# Altium PCB WX0.011.322PCB-4.2.PcbDoc (part 1 of 2)
Units mm, origin at the board's own origin, x right, y up, seen from the top; angles counter-clockwise.
Board outline 260.36 x 86.43 mm, 2 copper layers (Top Layer, Bottom Layer); 138 components, 92 nets, 432 pads, 350 vias.
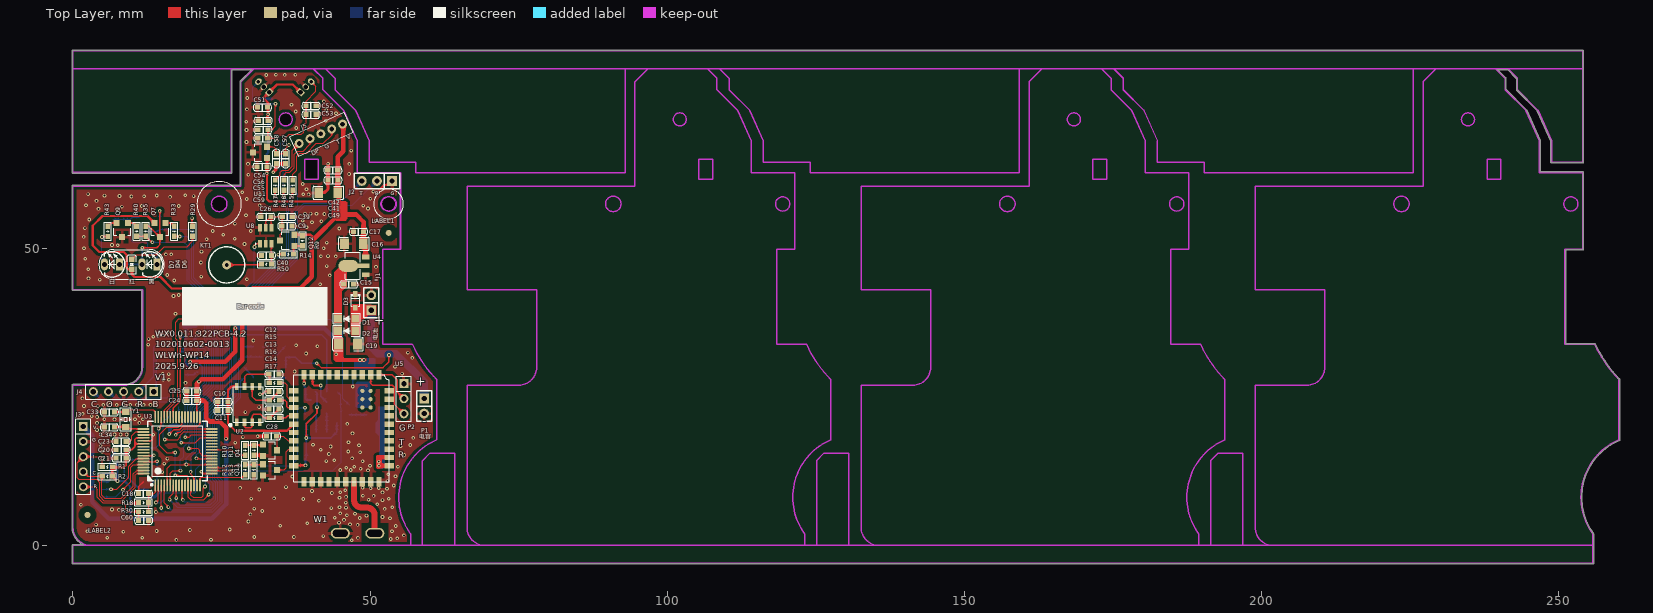
[diagram p0: Top Layer view]
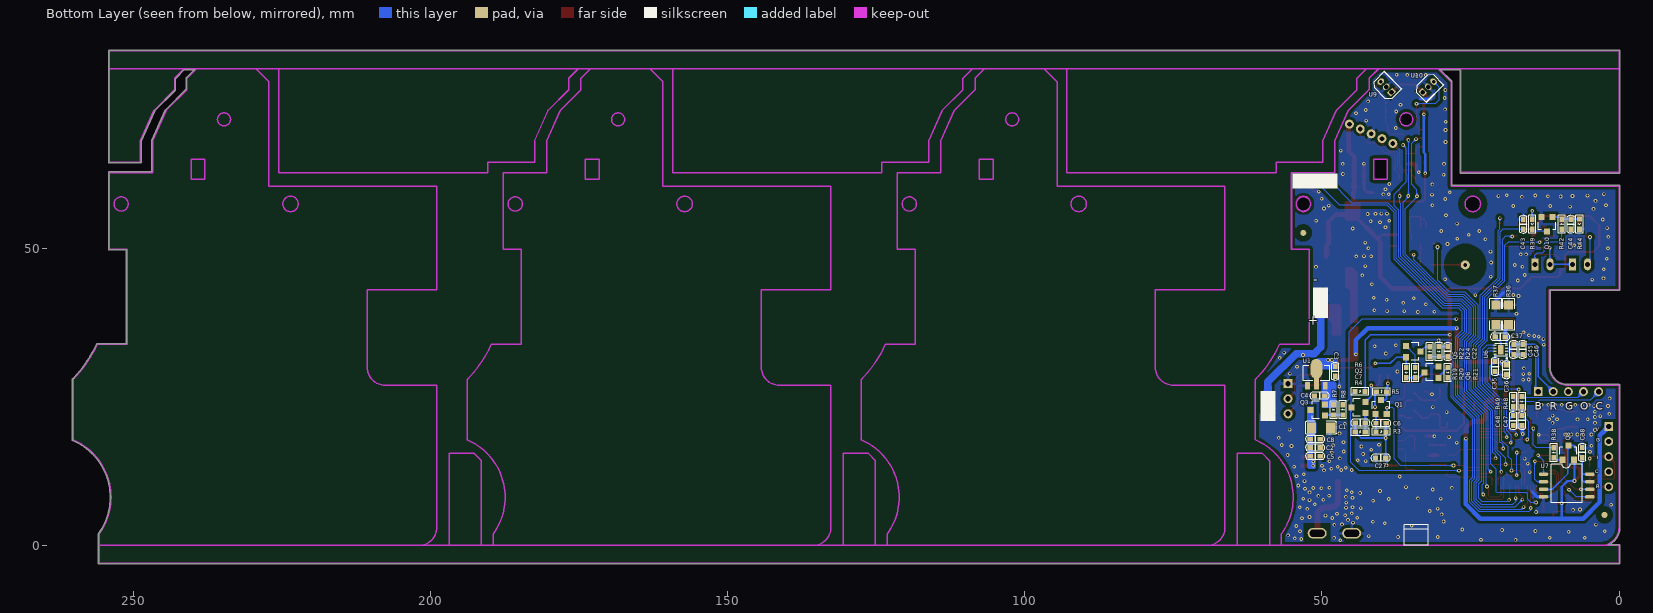
[diagram p1: Bottom Layer view, seen from below]

## Layer stack, top to bottom
Top Solder: solder mask 0.0102, Solder Resist, Dk 3.5
Top Layer: signal copper 0.0356
Dielectric 1: dielectric 0.32, FR-4, Dk 4.8
Bottom Layer: signal copper 0.0356
Bottom Solder: solder mask 0.0102, Solder Resist, Dk 3.5

## Board outline
-0.127,0 cw(c0,0) 0,0.127 1.757,0.127 cw(c3,2.997) -0.127,2.997 -0.127,26.957 cw(c0,26.957) 0,27.084 8.7,27.084 cw(c8.7,26.957) 8.7,27.084 cw(c8.7,26.957) 8.7,27.084 ccw(c8.7,29.957) 11.573,29.956 ccw(c8.7,29.957) 11.573,29.957 cw(c11.7,29.957) 11.573,29.958 11.573,42.915 0,42.915 cw(c0,43.043) -0.127,43.043 -0.127,60.443 cw(c0,60.443) 0,60.57 28.114,60.57 28.114,77.987 cw(c28.241,77.987) 28.152,78.077 28.151,78.077 30.123,80.049 26.748,80.049 26.748,62.738 cw(c26.621,62.738) 26.621,62.611 0,62.611 cw(c0,62.738) -0.127,62.738 -0.127,80.167 cw(c0,80.167) -0.127,80.171 cw(c0,80.176) -0.127,80.176 -0.127,83.176 cw(c0,83.176) 0,83.303 254,83.303 cw(c254,83.176) 254.127,83.176 254.127,64.491 cw(c254,64.491) 254,64.363 248.755,64.363 cw(c248.755,64.491) 248.627,64.491 248.627,68.05 246.379,73.101 242.899,76.581 242.899,76.58 cw(c242.989,76.671) 242.862,76.671 242.862,78.523 241.336,80.049 239.646,80.049 241.029,78.666 241.028,78.666 cw(c240.939,78.576) 241.066,78.576 241.066,76.724 244.525,73.264 cw(c244.435,73.174) 244.552,73.226 246.821,68.13 246.821,68.129 246.821,68.13 cw(c246.704,68.078) 246.832,68.078 246.832,62.843 254,62.843 cw(c254,62.716) 254.127,62.716 254.127,49.835 cw(c254,49.835) 254,49.707 251.127,49.707 251.127,33.924 256.014,33.924 cw(c256.014,33.797) 256.13,33.851 ccw(c275.5,42.883) 260.158,28.004 cw(c260.1,27.89) 260.227,27.89 260.227,17.78 cw(c260.102,17.759) 260.229,17.759 cw(c260.102,17.759) 260.151,17.642 ccw(c264.2,8.092) 253.827,8.092 cw(c253.7,8.092) 253.827,8.081 ccw(c264.199,8.092) 255.795,2.013 cw(c255.692,1.938) 255.819,1.938 255.819,0 cw(c255.692,0) 255.819,-0.005 255.819,-3 cw(c255.691,-3) 255.691,-3.127 0,-3.127 cw(c0,-3) -0.127,-3
cut-out: 39.003,64.973 39.003,61.573 41.303,61.573 41.303,64.973
cut-out: 35.79,70.567 cw(c35.79,71.667) 34.69,71.667 cw(c35.79,71.667) 35.79,72.767 cw(c35.79,71.667) 36.89,71.667 cw(c35.79,71.667)
cut-out: 24.6,56.142 cw(c24.6,57.442) 23.3,57.442 cw(c24.6,57.442) 24.6,58.742 cw(c24.6,57.442) 25.9,57.442 cw(c24.6,57.442)
cut-out: 53.1,56.142 cw(c53.1,57.442) 51.8,57.442 cw(c53.1,57.442) 53.1,58.742 cw(c53.1,57.442) 54.4,57.442 cw(c53.1,57.442)

## Design rules (kind name [scope] priority, off if disabled: settings)
Clearance VIA-VIA [ISVIA vs ISVIA] p1: gap=0.508 ignorepadtopadclearanceinfootprint=FALSE except(0: Arc-Hole Track-Hole SMDPad-Hole THPad-Hole Via-Hole Fill-Hole Poly-Hole Region-Hole Text-Hole)
Clearance VIA-PAD [ISVIA vs ISPAD] p2: gap=0.381 ignorepadtopadclearanceinfootprint=FALSE except(0: Arc-Hole Track-Hole SMDPad-Hole THPad-Hole Via-Hole Fill-Hole Poly-Hole Region-Hole Text-Hole)
Clearance VIA-TRACK [ISVIA vs ISTRACK] p3: gap=0.381 ignorepadtopadclearanceinfootprint=FALSE except(0: Arc-Hole Track-Hole SMDPad-Hole THPad-Hole Via-Hole Fill-Hole Poly-Hole Region-Hole Text-Hole)
Clearance Polygon [InPolygon] p4: gap=0.508 ignorepadtopadclearanceinfootprint=FALSE except(0: Arc-Hole Track-Hole SMDPad-Hole THPad-Hole Via-Hole Fill-Hole Poly-Hole Region-Hole Text-Hole)
Clearance [All] p5: gap=0.178 ignorepadtopadclearanceinfootprint=FALSE except(0: Arc-Hole Track-Hole SMDPad-Hole THPad-Hole Via-Hole Fill-Hole Poly-Hole Region-Hole Text-Hole)
ComponentClearance [All] p1 off: gap=0.254 collisioncheckmode=3 verticalgap=0.254 showdistances=FALSE
FabricationTestPointUsage TestPointUsage [All] p1: valid=0 allowmultiple=FALSE
FabricationTestpoint Testpoint [(IsPad And (OnTopLayer Or OnBottomLayer))] p1: side=3 testpointundercomponent=TRUE minsize=1.016 maxsize=2.54 preferedsize=1.524 minholesize=0 maxholesize=1.016 preferedholesize=0.813 testpointgrid=0.025 allowsidetop=TRUE allowsidebottom=TRUE usegrid=TRUE gridtolerance=0
HoleSize [All] p1 off: absolutevalues=TRUE maxlimit=7.62 minlimit=0 maxpercent=80.000 minpercent=20.000
HoleToHoleClearance [All] p1 off: gap=0.254 allowstackedmicrovias=TRUE
LayerPairs [All] p1 off: enforce=TRUE
MinimumSolderMaskSliver [All] p1 off: minsoldermaskwidth=0.254
NetAntennae [All] p1 off: netantennaetolerance=0
PlaneConnect [All] p1: planeconnectstyle=Relief reliefexpansion=0.508 reliefentries=4 reliefconductorwidth=0.508 reliefairgap=0.254
PolygonConnect [isvia] p1: connectstyle=Direct reliefconductorwidth=0.381 reliefentries=4 polygonreliefangle="90 Angle" airgapwidth=0.254
PolygonConnect PolygonConnect_1 [All] p2: connectstyle=Relief reliefconductorwidth=0.508 reliefentries=4 polygonreliefangle="90 Angle" airgapwidth=0.508
RoutingVias [All] p1: holewidth=0.254 width=0.508 viastyle="Through Hole" minholewidth=0.127 minwidth=0.127 maxholewidth=1.27 maxwidth=2.54
SilkToBoardRegionClearance [All] p1 off:
SilkToSilkClearance [All] p1 off: silktosilkclearance=0.254
SilkToSolderMaskClearance [IsPad] p1 off: minsilkscreentomaskgap=0.254 clearancetoexposedcopper=TRUE
SolderMaskExpansion [All] p1: expansion=0.102
Width [All] p1: maxlimit=7.62 minlimit=0.203 preferedwidth=0.203
18 further rules are at their usual default settings.

## Classes and differential pairs
component class WX0.011.324DL: C6 C7 C10 C11 C12 C13 C14 C27 C28 E1 P2 Q1 Q2 Q4 Q11 R3 R4 R5 R6 R10 R11 R12 R13 R15 R16 R17 U2 U5 W1
component class WX0.011.323DL: "Bar code" C1 C2 C3 C4 C5 C8 C9 C15 C16 C17 C18 C19 C20 C21 C22 C23 C24 C25 C26 C33 C34 C35 C36 C37 C38 C39 C40 C41 C42 C43 C44 C45 C46 C47 C48 C49 C51 C52 C53 C54 C55 C56 C57 C58 C59 C60 D1 D2 D3 D4 D6 D7 J1 J2 J3 J4 J5 KT1 LABEL1 LABEL2 P1 Q3 Q5 Q6 Q7 Q8 Q9 Q10 Q12 R1 R2 R7 R8 R9 R14 R18 R19 R20 R21 R22 R24 R29 R30 R33 R35 R36 R37 R38 R39 R40 R42 R43 R44 R45 R46 R47 R48 R49 R50 U1 U3 U4 U6 U7 U8 U9 U10 U11 Y1

## Components (designator, comment, footprint, x,y, rotation, side; value= is the part's Value field where it differs from the comment)
"Bar code" "Bar code" "Bar Code1" 83.745,62.535 r270 top
C1 "100uF/6.3V" GRM1206 50.149,19.787 r270 bottom
C2 "33pF/50V" CAP0603 51.945,16.459 r180 bottom
C3 "100nF/50V" CAP0603 47.728,30.124 r270 bottom
C4 "100nF/50V" CAP0603 49.532,25.171 r0 bottom
C5 "10pF/50V" CAP0603 51.945,15.011 r180 bottom
C6 "1nF" CAP0603 40.859,20.549 r180 bottom
C7 "1nF" CAP0603 44.359,20.619 r180 bottom
C8 "100nF/50V" CAP0603 51.945,17.882 r180 bottom
C9 "100pF/50V" CAP0603 36.832,53.721 r180 top
C10 "1μF/16V" CAP0603 24.386,24.155 r0 top
C11 "33pF" CAP0603 24.386,22.682 r0 top
C12 "33pF" CAP0603 34.647,28.804 r180 top
C13 "33pF" CAP0603 32.983,25.883 r0 top
C14 "33pF" CAP0603 32.983,22.936 r0 top
C15 "10uF/16V" CAP0603 45.569,43.917 r0 top
C16 "100uF" GRM1206 47.253,50.737 r270 top
C17 "100nF" CAP0603 47.195,52.769 r0 top
C18 "100nF" CAP0603 11.043,8.718 r0 top
C19 "100uF" GRM1206 46.28,33.846 r90 top
C20 "100nF" CAP0603 7.266,16.079 r0 top
C21 "10μF/10V" CAP0603 7.266,14.669 r0 top
C22 "10pF" CAP0603 28.805,33.434 r270 bottom
C23 "100nF" CAP0603 7.266,17.489 r0 top
C24 "100nF" CAP0603 19.152,24.359 r0 top
C25 "100nF" CAP0603 19.152,25.908 r0 top
C26 "1uF/16V" CAP0603 33.289,55.27 r180 top
C27 "1uF/16V" CAP0603 39.27,14.707 r0 bottom
C28 "33pF/50V" CAP0603 32.551,18.364 r0 top
C33 "22pF" CAP0603 5.281,22.442 r0 top
C34 "22pF" CAP0603 5.281,19.902 r0 top
C35 "100nF" CAP0603 20.855,29.249 r90 bottom
C36 "100nF" CAP0603 18.925,30.378 r270 bottom
C37 "10nF" CAP0603 20.83,35.066 r180 bottom
C38 "100nF" CAP0603 6.174,16.441 r270 bottom
C39 "100nF" CAP0603 35.206,55.296 r0 top
C40 "5pF" CAP0603 31.713,48.782 r0 top
C41 "100nF" CAP0603 42.902,61.443 r0 top
C42 "10μF/10V" CAP0603 42.877,63.094 r0 top
C43 "100pF/50V" CAP0603 16.131,53.194 r90 bottom
C44 "10pF/50V" CAP0603 8.104,54.865 r270 bottom
C45 "33pF" CAP0603 17.731,33.821 r270 bottom
C46 "100nF" CAP0603 16.207,33.821 r270 bottom
C47 "10nF" CAP0603 16.308,21.832 r270 bottom
C48 "10nF" CAP0603 17.807,20.168 r90 bottom
C49 "100uF" GRM1206 42.953,59.334 r270 top
C51 "1nF/50V" CAP0603 31.039,73.685 r0 top
C52 "33pF/50V" CAP0603 39.219,73.953 r0 top
C53 "1nF/50V" CAP0603 39.219,72.505 r0 top
C54 "1nF/50V" CAP0603 31.167,71.425 r0 top
C55 "33pF/50V" CAP0603 32.768,68.504 r180 top
C56 "1nF/50V" CAP0603 32.793,69.926 r180 top
C57 "1nF/50V" CAP0603 35.765,65.889 r270 top
C58 "33pF/50V" CAP0603 34.241,65.889 r270 top
C59 "1uF/16V" CAP0603 32.641,63.703 r180 top
C60 "33pF/50V" CAP0603 12.715,4.179 r180 top
D1 "DS12W" SOD-123FL 47.578,38.164 r180 top
D2 "DS36W" SOD-123FL 47.578,36.107 r180 top
D3 "XE3D5VB" SOD-323_L1.8-W1.3-LS2.5-RD 47.5,41.148 r270 top
D4 "Red" LED-0603 9.908,46.47 r90 top
D6 "AT403" LED2_300 14.153,47.283 r270 top
D7 "AT203-立" LED2_300 7.822,47.283 r270 top
J1 "CON2" SIP-2 50.192,39.548 r90 top
J2 "CON3" SIP-3 53.672,61.304 r180 top
J3 "CON5-2.54" PIN254_1*5*1100S 1.729,20.011 r270 top
J4 "CON5" PIN254_1*5*1100S 13.591,25.871 r180 top
J5 "BCON-B5" J_DIP_2.0_1*05_H 45.354,70.87 r204 top
KT1 "Touch" TOUCH-1 25.863,47.183 r0 top
LABEL1 "" MARK 53.113,52.578 r90 top
LABEL2 "" MARK 2.44,5.119 r90 top
P1 "Header 2" SIP-2 59.082,24.714 r270 top
P2 "模块调试" PIN254_1*3*WXHJ 55.678,27.203 r270 top
Q1 "NPNS-9013" SOT-23 40.027,23.266 r180 bottom
Q2 "NPNS-9013" SOT-23 43.842,23.19 r90 bottom
Q3 "UT3401ZG" SOT-23 50.7,22.784 r90 bottom
Q4 "NPNS-9013" SOT-23 33.149,16.002 r270 top
Q5 "PNPS-9012" SOT-23 34.622,32.602 r270 bottom
Q6 "NPNS-9013" SOT-23 31.548,29.122 r90 bottom
Q7 "PNPS-9012" SOT-23 14.632,53.049 r180 top
Q8 "PNPS-9012" SOT-23 8.536,15.609 r180 bottom
Q9 "PNPS-9012" SOT-23 8.282,53.049 r180 top
Q10 "NPNS-9013" SOT-23 12.117,54.026 r0 bottom
Q11 "NPNS-9013" SOT-23 33.149,12.7 r270 top
Q12 "UT3401ZG" SOT-23 36.05,51.308 r90 top
R1 "10K 5%" RES0603 4.929,13.233 r0 top
R2 "10K 5%" RES0603 4.904,11.647 r0 top
R3 "4.7kΩ±5%" RES0603 39.189,19.075 r0 bottom
R4 "4.7kΩ±5%" RES0603 42.689,19.069 r0 bottom
R5 "10kΩ±5%" RES0603 39.118,25.857 r0 bottom
R6 "10kΩ±5%" RES0603 42.724,25.883 r0 bottom
R7 "2M 5%" RES0603 48.033,21.946 r90 bottom
R8 "200K 5%" RES0603 46.484,23.647 r270 bottom
R9 "2M 5%" RES0603 38.61,50.394 r90 top
R10 "3K 5%" RES0603 28.958,15.164 r90 top
R11 "10K 5%" RES0603 30.456,15.164 r90 top
R12 "3K 5%" RES0603 28.958,11.862 r90 top
R13 "10K 5%" RES0603 30.431,11.862 r90 top
R14 "200K 5%" RES0603 37.086,48.971 r180 top
R15 "22Ω±5%" RES0603 33.038,27.356 r0 top
R16 "22Ω±5%" RES0603 33.038,24.409 r0 top
R17 "22Ω±5%" RES0603 33.038,21.463 r0 top
R18 "10kΩ±5%" RES0603 12.713,7.224 r180 top
R19 "10kΩ±5%" RES0603 35.816,28.208 r90 bottom
R20 "10kΩ±5%" RES0603 34.292,28.208 r90 bottom
R21 "3kΩ±5%" RES0603 28.805,28.208 r90 bottom
R22 "20K±1%" RES0603 31.828,33.44 r270 bottom
R24 "10kΩ±1%" RES0603 30.342,31.764 r90 bottom
R29 "1kΩ±5%" RES0603 20.093,52.001 r90 top
R30 "100Ω±5%" RES0603 12.713,5.679 r180 top
R33 "10kΩ±5%" RES0603 17.045,52.001 r90 top
R35 "20K±5%" RES0603 12.219,52.001 r90 top
R36 "1Ω±1%" R1206 18.569,40.476 r270 bottom
R37 "1Ω±1%" R1206 20.728,40.476 r270 bottom
R38 "3kΩ±5%" RES0603 10.974,16.447 r270 bottom
R39 "20kΩ±5%" RES0603 14.607,53.188 r90 bottom
R40 "3kΩ±5%" RES0603 10.695,52.001 r90 top
R42 "20kΩ±5%" RES0603 9.628,54.865 r270 bottom
R43 "100Ω±5%" RES0603 5.869,53.678 r270 top
R44 "47K±5%" RES0603 6.656,53.194 r90 bottom
R45 "0Ω±5%" RES0603 36.959,59.766 r90 top
R46 "0Ω±5%" RES0603 35.511,59.766 r90 top
R47 "0Ω±5%" RES0603 34.038,59.766 r90 top
R48 "100Ω±5%" RES0603 16.334,23.356 r90 bottom
R49 "100Ω±5%" RES0603 17.807,23.356 r90 bottom
R50 "100Ω±5%" RES0603 31.707,47.334 r0 top
U1 "CE6232A33P" SOT-89 50.903,27.722 r180 bottom
U2 "SIM" SIMIC 31.991,26.726 r180 top
U3 "FM33LE026" LQFP-64_L10.0-W10.0-P0.50-LS12.0-BL 17.604,15.843 r0 top
U4 "CE6232-3.3" SOT-89 48.327,47.03 r90 top
U5 "UMN601" N700-FIXTURE_DL_CFT_CQA 53.177,28.693 r180 top locked
U6 "DRV8837DSGR" S-PWSON-N8 19.875,32.894 r0 bottom
U7 "P25Q80H-SUH-IR" SOP-8L-200MIL 12.702,11.975 r180 bottom locked
U8 "TTP233H" SOT-23-6 31.485,50.763 r0 top
U9 "KTM1301SE" ESP3_QYSW_JSZ 38.275,76.237 r45 bottom locked
U10 "KTM1301SE" ESP3_QYSW_JSZ 33,76.237 r135 bottom locked
U11 "S-5712ACDL1" SOT-23 31.472,66.116 r90 top
W1 "天线" ANT-tanpian 50.776,2.046 r180 top
Y1 "32.768K" SMD-3215_2P 8.876,19.942 r90 top

## Footprints (in the part's own frame and the unit in brackets; to place one, negate y for a bottom-side part, rotate by r counter-clockwise, add the part's x,y. Pads: shape width x height; smd on the part's side, far side on the other; paste and mask are expansions set on the pad)
ANT-tanpian [mm]
  oval 3.2x1.8 hole 1.2 slot 2.5 at 0 deg: 1(0,0) 2(5.8,0)
"Bar Code1" [mm]
  silkscreen extent 19.08,-65.42 25.58,-40.92
CAP0603 [mil]
  rect 35x31 smd: 1(-0.49,0) 2(66.51,0)
  silkscreen extent -29,-24 94,23, body extent 1,-15 72,15, height 20
ESP3_QYSW_JSZ [mm]
  rect 0.9x1.2 hole 0.8: 1(0,0)
  oval 0.9x1.2 hole 0.8: 2(1.27,0)
  oval 0.9x1.2 hole 0.6: 3(2.54,0)
  silkscreen extent -0.8,-1.6 3.34,1.5
GRM1206 [mm]
  rect 1.728x1.485 smd: 1(0,-1.593) 2(0,1.593)
  silkscreen extent -1.09,-2.56 1.09,2.56
J_DIP_2.0_1*05_H [mm]
  round 1.5 hole 0.8: 1(0,0) 2(2,0) 3(4,0) 4(6,0) 5(8,0)
  silkscreen extent -1.02,-1.7 9.02,1.9
LED2_300 [mm]
  rect 2x1.2 hole 0.813: 1(0,0)
  oval 2x1.2 hole 0.813: 2(0,-2.54)
  silkscreen extent -2.16,-2.53 2.16,0.91, body extent -1.65,-2.91 1.64,0.39, height 5.51
LED-0603 [mil]
  rect 35x35 smd: 1(0,0) 2(65,0)
  silkscreen extent -30,-30 95,30
LQFP-64_L10.0-W10.0-P0.50-LS12.0-BL [mm]
  oval 0.3x2 smd: 1(-3.75,-5.75) 2(-3.25,-5.75) 3(-2.75,-5.75) 4(-2.25,-5.75) 5(-1.75,-5.75) 6(-1.25,-5.75) 7(-0.75,-5.75) 8(-0.25,-5.75) 9(0.25,-5.75) 10(0.75,-5.75) 11(1.25,-5.75) 12(1.75,-5.75) 13(2.25,-5.75) 14(2.75,-5.75) 15(3.25,-5.75) 16(3.75,-5.75) 33(3.75,5.75) 34(3.25,5.75) 35(2.75,5.75) 36(2.25,5.75) 37(1.75,5.75) 38(1.25,5.75) 39(0.75,5.75) 40(0.25,5.75) 41(-0.25,5.75) 42(-0.75,5.75) 43(-1.25,5.75) 44(-1.75,5.75) 45(-2.25,5.75) 46(-2.75,5.75) 47(-3.25,5.75) 48(-3.75,5.75)
  oval 2x0.3 smd: 17(5.75,-3.75) 18(5.75,-3.25) 19(5.75,-2.75) 20(5.75,-2.25) 21(5.75,-1.75) 22(5.75,-1.25) 23(5.75,-0.75) 24(5.75,-0.25) 25(5.75,0.25) 26(5.75,0.75) 27(5.75,1.25) 28(5.75,1.75) 29(5.75,2.25) 30(5.75,2.75) 31(5.75,3.25) 32(5.75,3.75) 49(-5.75,3.75) 50(-5.75,3.25) 51(-5.75,2.75) 52(-5.75,2.25) 53(-5.75,1.75) 54(-5.75,1.25) 55(-5.75,0.75) 56(-5.75,0.25) 57(-5.75,-0.25) 58(-5.75,-0.75) 59(-5.75,-1.25) 60(-5.75,-1.75) 61(-5.75,-2.25) 62(-5.75,-2.75) 63(-5.75,-3.25) 64(-5.75,-3.75)
  silkscreen extent -5,-5.79 5,5
MARK [mm]
  round 1 smd: 0(0,0)
  round 1 smd far side: 1(0,0)
  Top Layer pour cut-out: -1.5,0 -1.386,-0.574 -1.061,-1.061 -0.574,-1.386 0,-1.5 0,-1.5 0.574,-1.386 1.061,-1.061 1.386,-0.574 1.5,0 1.5,0 1.386,0.574 1.061,1.061 0.574,1.386 0,1.5 0,1.5 -0.574,1.386 -1.061,1.061 -1.386,0.574 -1.5,0
  Bottom Layer pour cut-out: -1.5,0 -1.386,-0.574 -1.061,-1.061 -0.574,-1.386 0,-1.5 0,-1.5 0.574,-1.386 1.061,-1.061 1.386,-0.574 1.5,0 1.5,0 1.386,0.574 1.061,1.061 0.574,1.386 0,1.5 0,1.5 -0.574,1.386 -1.061,1.061 -1.386,0.574 -1.5,0
N700-FIXTURE_DL_CFT_CQA [mm]
  rect 0.9x1.6 smd mask+0.05: 1(1.7,0) 2(3.1,0) 3(4.5,0) 4(5.9,0) 5(7.3,0) 6(8.7,0) 7(10.1,0) 8(11.5,0) 9(12.9,0) 10(14.3,0) 21(14.3,18) 22(12.9,18) 23(11.5,18) 24(10.1,18) 25(8.7,18) 26(7.3,18) 27(5.9,18) 28(4.5,18) 29(3.1,18) 30(1.7,18)
  rect 1.6x0.9 smd mask+0.05: 11(16,2.7) 12(16,4.1) 13(16,5.5) 14(16,6.9) 15(16,8.3) 16(16,9.7) 17(16,11.1) 18(16,12.5) 19(16,13.9) 20(16,15.3) 31(0,15.3) 32(0,13.9) 33(0,12.5) 34(0,11.1) 35(0,9.7) 36(0,8.3) 37(0,6.9) 38(0,5.5) 39(0,4.1) 40(0,2.7)
  round 0.7 smd mask+0.05: 41(3.1,5.5) 42(3.1,4.1) 43(3.1,2.7) 44(4.5,2.7) 45(4.5,4.1) 46(4.5,5.5)
  silkscreen extent 0,0 16,18
PIN254_1*3*WXHJ [mm]
  rect 1.5x1.5 hole 0.9: 1(0,0)
  round 1.5 hole 0.9: 2(2.54,0) 3(5.08,0)
  silkscreen extent -1.27,-1.27 6.35,1.27
PIN254_1*5*1100S [mm]
  rect 1.5x1.5 hole 0.9: 1(0,0)
  round 1.5 hole 0.9: 2(2.54,0) 3(5.08,0) 4(7.62,0) 5(10.16,0)
  silkscreen extent -1.27,-1.27 11.43,1.27
R1206 [mil]
  rect 60x60 smd: 1(0,0) 2(130,0)
  silkscreen extent -40,-40 170,40
RES0603 [mil]
  rect 35x31 smd: 1(0,0) 2(67,0)
  silkscreen extent -26,-24 92,23, body extent 0,-15 71,15, height 12
S-PWSON-N8 [mm]
  rect 0.5x0.28 smd: 1(-0.95,0.75) 2(-0.95,0.25) 3(-0.95,-0.25) 4(-0.95,-0.75) 5(0.95,-0.75) 6(0.95,-0.25) 7(0.95,0.25) 8(0.95,0.75)
  rect 0.9x1.6 smd: 9(0,0)
  silkscreen extent -1.09,-1.05 1.04,1.52, body extent -0.98,-1 1.02,1, height 0.77
SIMIC [mm]
  rect 0.6x1.2 smd: 1(4.405,6) 2(3.135,6) 3(1.865,6) 4(0.595,6) 5(0.595,0) 6(1.865,0) 7(3.135,0) 8(4.405,0)
  silkscreen extent 0,0 5.59,6.56, body extent 0,0 4.95,5.97, height 0.6
SIP-2 [mil]
  rect 65x65 hole 35: 1(0,0)
  round 65 hole 35: 2(100,0)
  silkscreen extent -50,-50 150,50
SIP-3 [mil]
  rect 65x65 hole 35: 1(0,0)
  round 65 hole 35: 2(100,0) 3(200,0)
  silkscreen extent -50,-50 250,50
SMD-3215_2P [mm]
  rect 1x1.3 smd: 1(0,0) 2(2.5,0)
  silkscreen extent -0.69,-0.91 3.19,0.91, body extent -0.3,-0.99 2.9,0.99, height 0.7
SOD-123FL [mm]
  rect 1.3x1.4 smd: 1(0.074,0) 2(2.974,0)
  silkscreen extent -0.78,-0.9 3.82,0.9, body extent -0.28,-0.82 3.32,0.83, height 0.95
SOD-323_L1.8-W1.3-LS2.5-RD [mm]
  rect 1x0.75 smd: 1(-1.173,0) 2(1.173,0)
  silkscreen extent -1.08,-0.8 0.9,0.8
SOP-8L-200MIL [mm]
  oval 1.6x0.61 smd: 1(0,0) 2(0,-1.27) 3(0,-2.54) 4(0,-3.81) 5(7.8,-3.81) 6(7.8,-2.54) 7(7.8,-1.27) 8(7.8,0)
  silkscreen extent 1.27,-4.83 6.48,1.68, body extent 0.89,-4.35 6.89,0.55, height 1.7
SOT-23 [mil]
  rect 40x40 smd: 1(-37.4,-47.24) 2(37.4,-47.24) 3(0,47.24)
  silkscreen extent -57,-12 57,35, body extent -57,-55 57,55, height 47
SOT-23-6 [mil]
  rect 25x50 smd: 1(0,0) 2(37.5,0) 3(75,0) 4(75,105) 5(37.5,105) 6(0,105)
  silkscreen extent -33,-3 -27,3
SOT-89 [mm]
  rect 0.8x1.27 smd: 1(-1.5,-0.9) 3(1.5,-0.9)
  rect 0.8x2.54 smd: 2(0,-0.265)
  oval 2x3.3 smd: 2(0,2)
  silkscreen extent -2.25,0 2.25,2.5, body extent -2.25,-1.02 2.25,2.92, height 1.4
TOUCH-1 [mil]
  round 60 hole 25: 1(0,0)
  Top Layer pour cut-out: 0,-120 -7.87,-120 -23.46,-117.95 -38.66,-113.88 -53.19,-107.86 -66.81,-99.99 -79.29,-90.41 -90.41,-79.29 -99.99,-66.81 -107.86,-53.19 -113.88,-38.66 -117.95,-23.46 -120,-7.87 -120,0 -120,7.87 -117.95,23.46 -113.88,38.66 -107.86,53.19 -99.99,66.81 -90.41,79.29 -79.29,90.41 -66.81,99.99 -53.19,107.86 -38.66,113.88 -23.46,117.95 -7.87,120 0,120 7.87,120 23.46,117.95 38.66,113.88 53.19,107.86 66.81,99.99 79.29,90.41 90.41,79.29 99.99,66.81 107.86,53.19 113.88,38.66 117.95,23.46 120,7.87 120,0 120,-7.87 117.95,-23.46 113.88,-38.66 107.86,-53.19 99.99,-66.81 90.41,-79.29 79.29,-90.41 66.81,-99.99 53.19,-107.86 38.66,-113.88 23.46,-117.95 7.87,-120 0,-120
  silkscreen extent -120,-120 120,120

## Part data
"Bar code": library part txm
C1: library part 101020101-0020, "100uF,6.3 V,±20%,1206,村田,GRM31CR60J107ME39L"
C2 C28 C52 C55 C58 C60: library part 101020103-0027, "33pF,50 V,±10%,0603,国巨,CC0603KRNPO9BN33"
C3 C4 C8: library part 101020103-0021, "104pF,50 V,±10%,0603,国巨,CC0603KRX7R9BB104"
C5 C44: library part 101020103-0014, "10pF,50 V,±5%,0603,X7R,国巨,CC0603JRNPO9BN100"
C6 C7: library part 6, "贴片电容,1nF±10%/50V,X7R,国巨"
C9 C43: library part 101020103-0010, "101pf,50 V,±5%,0603,国巨,CC0603JRNP09BN101"
C10 C42: library part 2, "贴片电容,1μF±10%/16V,X7R,国巨"
C11 C12 C13 C14: library part 4, "贴片电容,33pF±10%/50V,NP0,国巨"
C15: library part 101020103-0003, "105pF,16V,±10%,0603,国巨,CC0603KRX7R7BB105"
C16 C19 C49: library part 16, "贴片电容,100uF±20%/6.3V,X5R,村田"
C17 C18 C20 C23 C24 C25 C35 C36 C38 C39 C41 C45 C46: library part 1, "贴片电容,100nF±10%/50V,X7R,国巨"
C21: library part 8, "贴片电容,10μF±10%/10V,X7R,村田"
C22: library part 15, "贴片电容,12pF±5%/50V,NPO,国巨"
C26 C27 C59: library part 101020103-0003, "105pF,16 V,±10%,0603,国巨,CC0603KRX7R7BB105"
C33 C34: library part 3, "贴片电容,22pF±5%/50V,NP0,国巨"
C37 C47 C48: library part 5, "贴片电容,10nF±10%/50V,X7R,国巨"
C40: library part 18, "贴片电容,4.7pF±0.25pF/50V,NPO,国巨"
C51 C53 C54 C56 C57: library part 101020103-0022, "102pF,50 V,±10%,0603,国巨,CC0603KRX7R9BB102"
D1 D2: library part 101040101-0055, "DS36W,SOD123-FL,3 A,42 V,60 V,浙江领晨科技有限公司,DS36W"
D3: library part 12, "具有3.5pF低结电容，适用于IO线、电源线、高速信号的ESD二极管阵列,SOD-323,5 V,5 V,350 W,5 A,1 uA,矽航,XE3D5VB"
D4: library part 3, "发光二极管,红色,0603,光宝"
D6: library part 6, "红外接收头，插件，红光，AT403_PD_01"
D7: library part 5, "红外发射头，插件，红光，AT203"
J1: library part 1, "焊接插座,间距2.54mm"
J2: library part 2, "焊接插座,间距2.54mm"
J3: library part 15, "焊接插座,间距2.0mm"
J4: library part 4, "焊接插座,间距2.54mm"
J5: library part 14, "焊接插座,90度插板双面焊盘,公头,间距1.5mm"
KT1: library part 2, "按键,6mm弹簧按键,按键直径10mm"
LABEL1 LABEL2: library part 1, "标准Mark点,直径1mm,阻焊开窗3mm"
P2: library part AD_WXHJ_PinHeader_04, "1*3 ，Φ1.0 ，2.54mm，直脚,无需焊接器件"
Q1 Q2 Q4 Q6 Q10 Q11: library part 101040201-0002, "9013,NPN,SOT-23,长电,S9013"
Q3 Q12: library part 101040201-0013, "UT3401ZG,P-MOS,SOT-23,UTC,UT3401ZG"
Q5 Q7 Q8 Q9: library part 101040201-0001, "9012,PNP,SOT-23,JCET;长电,S9012"
R1 R2 R11 R13: library part 101010103-0003, "国巨,±5%,0603,,155 ℃,-55 ℃,RC0603JR-0710KL,无铅,200 ppm/℃,1/10W,,10K"
R3 R4 R21: library part 12, "贴片电阻,4.7kΩ±5%,1/10W,100ppm/℃,国巨"
R5 R6 R18 R19 R20 R38: library part 2, "贴片电阻,10kΩ±5%,1/10W,100ppm/℃,国巨"
R7 R9: library part 101010103-0025, "国巨,±5%,0603,,155 ℃,-55 ℃,RC0603JR-072ML,含铅,100 ppm/℃,1/10W,,2M"
R8 R14: library part 101010103-0034, "200K,±5%,1/10W,0603,国巨,RC0603JR-07200KL"
R10 R12: library part 101010103-0006, "国巨,±5%,0603,,155 ℃,-55 ℃,RC0603JR-073KL,无铅,100 ppm/℃,1/10W,,3K"
R15 R16 R17: library part 14, "贴片电阻,22Ω±5%,1/10W,100ppm/℃,国巨"
R22: library part 23, "贴片电阻，20K,±1%,1/10W,0603,国巨,RC0603FR-0720KL"
R24: library part 6, "贴片电阻,10kΩ±1%,1/10W,100ppm/℃,国巨"
R29 R33 R40: library part 1, "贴片电阻,1kΩ±5%,1/10W,100ppm/℃,国巨"
R30: library part 15, "贴片电阻,0Ω±5%,1/10W,100ppm/℃,国巨"
R35: library part 4, "贴片电阻,1MΩ±5%,1/10W,100ppm/℃,国巨"
R36 R37: library part 41, "贴片电阻，1Ω±1%,1/4W,1206,国巨,RC1206FR-071RL"
R39: library part 8, "贴片电阻,100kΩ±5%,1/10W,100ppm/℃,国巨"
R42: library part 7, "贴片电阻,20kΩ±5%,1/10W,100ppm/℃,国巨"
R43 R45 R46 R47 R48 R49 R50: library part 5, "贴片电阻,100Ω±5%,1/10W,100ppm/℃,国巨"
R44: library part 22, "贴片电阻，47K,±5%,1/10W,0603,国巨,RC0603JR-0747KL"
U1 U4: library part 1010503-0029, "CE6232-3.3,CE6232-3.3,SOT89-3,8V,1.8V,0.11V,3.3V,300mA,0.8uA,南京芯力微电子有限公司"
U2: library part 2, "集成电路,ESIM,杭州电信"
U3: library part 10, "单片机,FM33LE026,复旦微"
U5: library part 1011402-0183, "N700-58-01,N700-58-01,通信模块,18.0mm*16.0mm*2.1mm,Band 5:850MHz/Band 8:900MHz,深圳市广和通无线股份有限公司"
U6: library part 101050101-0060, "DRV8837DSGR,S-PWSON-N8,TI,DRV8837DSGR"
U7: library part 101050101-0218, "P25Q80H-SUH-IR,SOP8 208mil,普冉半导体（上海）股份有限公司,P25Q80H-SUH-IR"
U8: library part 5, "集成电路，TTP233H,TONTEK"
U9 U10: library part 30, "昆泰KTM1301SE（插件）"
U11: library part 1010504-0002, "S-5712ACDL1,SOT23-3,3.5 V,1.6 V,2 uA,精工电子,S-5712ACDL1"
W1: library part 1010902-0145, "UB06000058A,3*3.1*1.25mm,公头,单排,IPEX一代板端"
Y1: library part 2, "晶振,32.768KHz,±20ppm,12.5pF,3215,EPSON"

## Via types
v1: diameter 0.61, hole 0.305, Top Layer to Bottom Layer, tented both sides, 350 vias

## Nets (pads, with @x,y where several pads share a name; then routed paths per layer and width w, separated by ;. In a path a pad name is that pad's centre, name@x,y a point inside that pad or via, vN(x,y) a via of type N, cw(c..) or ccw(c..) an arc to the next point about the centre after c; other vN are vias at no path point)
AIN8: C37.2 R36.2 R37.2 U3.42 U6.4 | length 19.3
  Top Layer w0.254: U3.42@16.854,21.593 16.854,23.102 18.059,24.308 18.059,35.067 v1(18.036,35.091)
  Bottom Layer w0.254: v1@18.036,35.066 C37.2@19.14,35.066
  Bottom Layer w0.508: C37.2@19.14,35.066 19.14,36.247 18.569,36.818 R37.2@20.728,36.818
CLOSE: C48.2 R49.1 U3.32 | length 12.4
  Top Layer w0.203: v1(17.299,18.593) 17.719,19.013 18.047,19.013 18.627,19.593 U3.32@23.354,19.593
  Bottom Layer w0.203: v1(17.299,18.593) 17.299,18.999 17.54,19.24 18.125,19.24 18.544,19.659 18.544,21.121 C48.2@17.807,21.858 R49.1@17.807,23.356
CTR_F_VCC: R38.1 U3.46 | length 8.5
  Top Layer w0.203: v1(14.403,19.673) 14.854,20.124 U3.46@14.854,21.593
  Bottom Layer w0.203: R38.1@10.974,16.447 13.946,16.447 14.403,16.905 v1(14.403,19.673)
DB_RXD: J2.2 U3.7 | length 84.2
  Top Layer w0.203: v1(16.258,7.696) 16.258,8.142 16.854,8.738 U3.7@16.854,10.093
  Bottom Layer w0.203: v1(16.258,7.696) 17.539,6.414 23.253,6.414 24.386,7.547 24.386,10.662 23.878,11.17 23.878,21.584 27.497,25.204 27.497,35.078 26.367,36.208 26.367,39.282 27.002,39.917 29.613,39.917 37.848,48.151 37.848,56.058 38.979,57.189 47.017,57.189 J2.2@51.132,61.304
DB_TXD: J2.3 U3.8 | length 80.3
  Top Layer w0.203: U3.8@17.354,10.093 17.354,8.044 17.448,7.95 v1(17.375,7.95)
  Bottom Layer w0.203: v1(17.375,7.95) 17.375,7.38 17.959,6.795 23.096,6.795 24.005,7.704 24.005,10.504 23.497,11.012 23.497,21.742 27.116,25.362 27.116,34.92 25.986,36.05 25.986,39.44 26.844,40.298 29.455,40.298 37.467,48.309 37.467,56.236 38.801,57.57 44.858,57.57 J2.3@48.592,61.304
DRV+: C45.2 C46.2 J4.1 U6.2 | length 11.3
  Bottom Layer w0.254: J4.1@13.591,25.871 14.022,26.303 14.022,31.687 14.467,32.132 C46.2@16.207,32.132 C45.2@17.731,32.132 18.244,32.644 U6.2@18.924,32.644
DRV-: C45.1 C46.1 J4.2 U6.3 | length 14.3
  Bottom Layer w0.254: J4.2@11.051,25.871 13.591,28.411 13.591,33.313 14.111,33.833 C46.1@16.207,33.833 C45.1@17.731,33.833 18.42,33.144 U6.3@18.924,33.144
EXTI1: R45.1 U3.12 U3.39 | length 83.8
  Top Layer w0.203: v1(17.197,11.786) 19.167,11.786 19.354,11.599 U3.12@19.354,10.093 19.354,8.139 19.783,7.71 21.986,7.71 v1(22.836,8.56) ; v1(17.197,15.635) 17.172,15.609 15.8,15.609 14.632,16.778 14.632,18.708 15.775,19.851 17.705,19.851 18.354,20.499 U3.39@18.354,21.593 ; v1(36.906,58.776) 36.906,59.612 R45.1@37.009,59.715
  Bottom Layer w0.203: v1(17.197,11.786) v1(17.197,15.635) ; v1(22.836,8.56) 22.989,8.712 22.989,10.232 22.735,10.486 22.735,22.058 26.354,25.677 26.354,34.605 25.224,35.735 25.224,39.755 26.528,41.06 29.14,41.06 36.705,48.625 36.705,57.443 36.906,57.645 v1(36.906,58.776)
EXTI2: C52.1 C53.1 R46.1 U3.13 U9.3 | length 87.4
  Top Layer w0.203: U3.13@19.854,10.093 19.854,8.432 20.195,8.091 21.642,8.091 21.896,8.345 21.896,9.627 22.175,9.906 v1(22.201,9.906) ; v1(35.435,68.224) 35.497,68.224 36.4,69.127 38.432,69.127 38.813,69.508 38.813,70.702 39.207,71.096 C53.1@39.207,72.505 C52.1@39.207,73.953 39.207,74.753 40.819,76.366 40.819,77.285 U9.3@40.071,78.033 ; v1(35.45,58.776) 35.45,59.705 R46.1@35.511,59.766
  Bottom Layer w0.203: v1(22.201,9.906) 22.354,10.058 22.354,22.216 25.973,25.835 25.973,34.447 24.843,35.577 24.843,39.913 26.371,41.441 28.982,41.441 36.324,48.783 36.324,57.76 35.45,58.633 v1(35.45,58.776) ; v1@35.435,58.649 35.384,58.699 35.384,68.174 v1(35.435,68.224)
EXTI3: C55.1 C56.1 R47.1 U3.17 U10.3 | length 84.5
  Top Layer w0.203: v1(21.566,12.383) 21.595,12.383 21.885,12.093 U3.17@23.354,12.093 ; v1(33.987,58.75) R47.1@33.987,59.715 ; v1(34.063,74.295) 34.063,70.485 33.504,69.926 C56.1@32.805,69.926 32.805,68.529 C55.1@32.78,68.504 34.012,68.504 v1(34.165,68.351)
  Bottom Layer w0.203: v1(21.566,12.383) 21.973,12.79 21.973,22.373 25.592,25.993 25.592,34.289 24.462,35.419 24.462,40.071 26.213,41.822 28.824,41.822 35.943,48.94 35.943,56.642 33.987,58.598 33.987,59.842 34.876,60.731 34.876,67.64 v1(34.165,68.351) ; U10.3@31.204,78.033 30.226,77.056 30.226,74.945 30.876,74.295 v1(34.063,74.295)
EXTI4: C43.1 Q10.3 R39.1 U3.5 U3.20 | length 61.8
  Top Layer w0.203: U3.5@15.854,10.093 15.854,12.981 16.475,13.603 v1(19.077,13.603) ; v1@19.077,13.593 U3.20@23.354,13.593
  Bottom Layer w0.203: Q10.3@12.117,52.826 14.245,52.826 R39.1@14.607,53.188 16.124,53.188 C43.1@16.131,53.182 19.579,53.182 19.966,52.795 19.966,44.861 22.938,41.889 22.938,34.788 24.068,33.658 24.068,26.624 20.449,23.005 20.449,16.02 20.013,15.584 20.001,15.584 19.077,14.66 v1(19.077,13.603)
FLASH_CLK: U3.59 U7.6 | length 10.2
  Top Layer w0.203: v1(6.404,9.435) 7.329,9.435 9.349,11.455 9.349,13.303 10.639,14.593 U3.59@11.854,14.593
  Bottom Layer w0.203: U7.6@4.902,9.435 v1(6.404,9.435)
FLASH_CS: U3.58 U7.1 | length 5.3
  Top Layer w0.203: U3.58@11.854,15.093 13.557,15.093 v1(13.616,15.152)
  Bottom Layer w0.203: U7.1@12.702,11.975 12.702,14.238 v1(13.616,15.152)
FLASH_MISO: U3.60 U7.2 | length 7
  Top Layer w0.203: U3.60@11.854,14.093 14.081,14.093 v1(14.149,14.161)
  Bottom Layer w0.203: U7.2@12.702,10.705 13.741,10.705 14.149,11.113 v1(14.149,14.161)
FLASH_MOSI: U3.61 U7.5 | length 10.6
  Top Layer w0.203: v1(8.409,9.373) 9.73,10.693 9.73,13.145 10.178,13.593 U3.61@11.854,13.593
  Bottom Layer w0.203: U7.5@4.902,8.165 7.202,8.165 v1(8.409,9.373)
FLASH_VCC: C38.2 Q8.3 U7.3 U7.7 U7.8 | length 20.1
  Bottom Layer w0.254: U7.7@4.902,10.705 5.944,10.705 6.174,10.936 6.174,11.977 ; U7.8@4.902,11.975 6.172,11.975 6.174,11.977 ; U7.3@12.702,9.435 11.23,9.435 8.587,12.079 8.587,16.758 Q8.3@8.536,16.809 7.514,16.809 7.368,16.662 7.368,15.946 C38.2@6.174,14.752 6.174,11.977
FLASH_WP: U3.56